# Altium PCB ESC_BOARD.PcbDoc (part 2 of 3)
Units mm, origin at the board's own origin, x right, y up, seen from the top; angles counter-clockwise.
Board outline 80 x 50 mm, 2 copper layers (Top Layer, Bottom Layer); 102 components, 86 nets, 400 pads, 339 vias.
Unrouted connection lines stored in the file: 55.
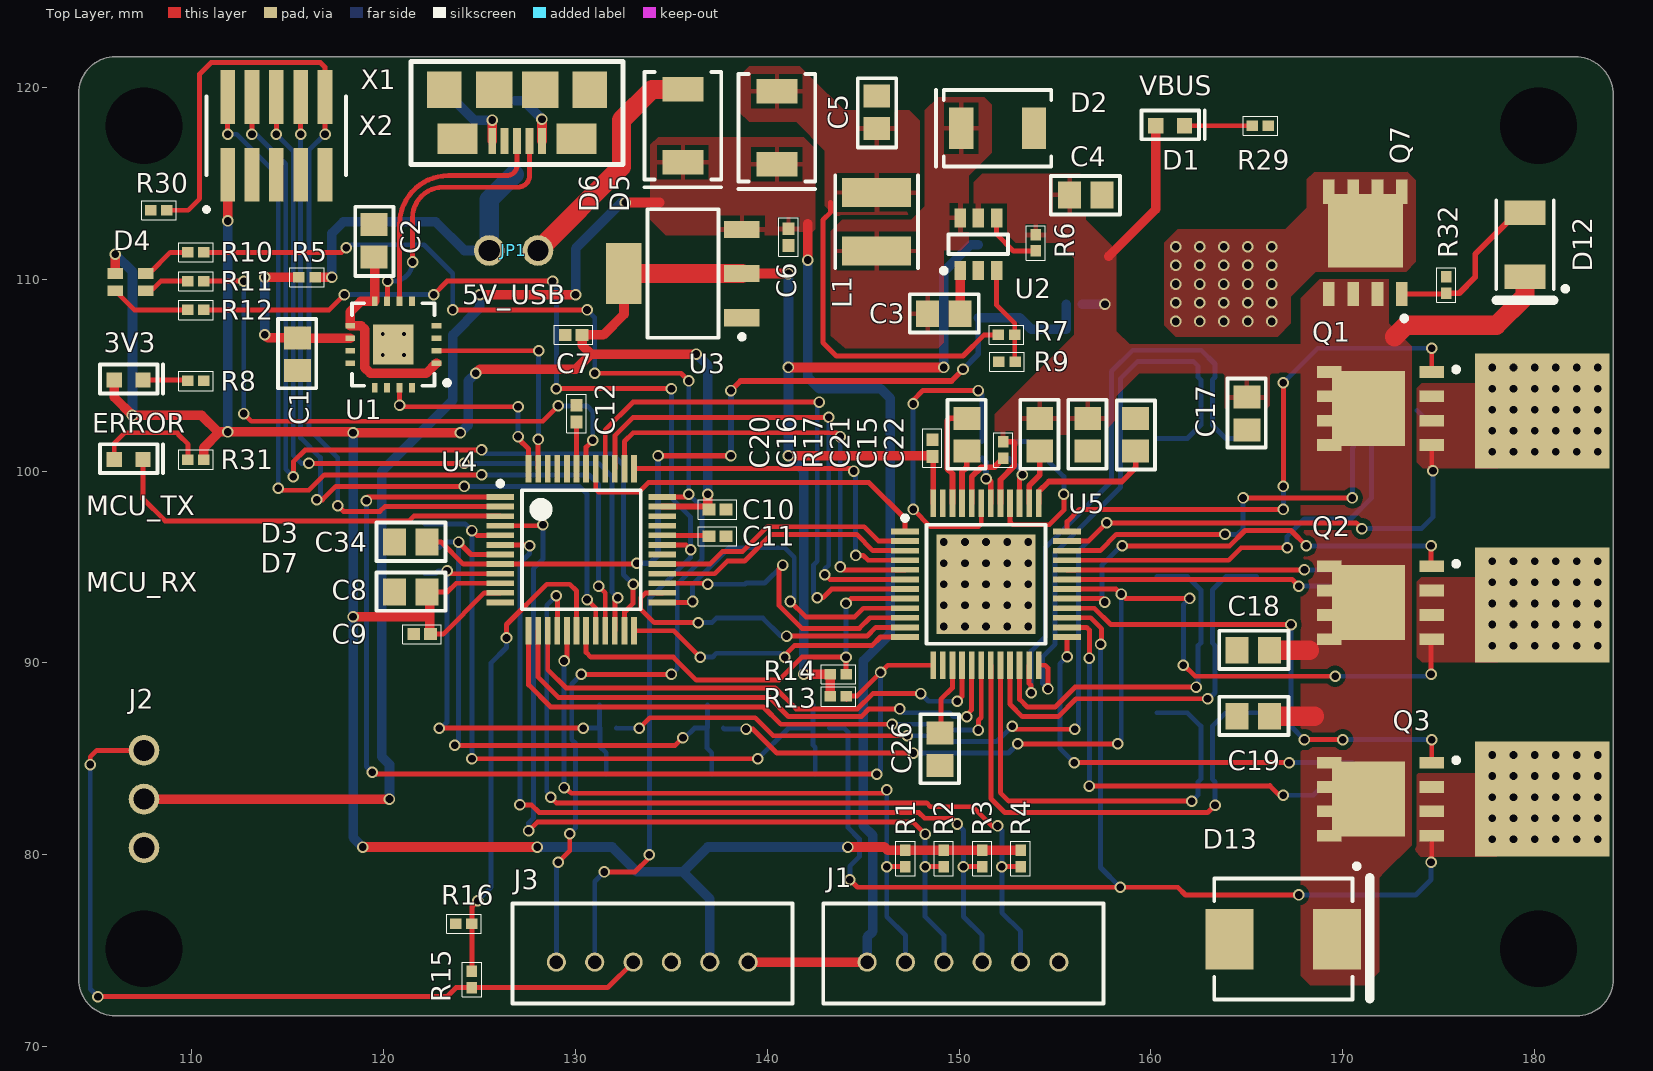
[diagram p0: Top Layer view]

## Part data (continued)
U3: "IC LDO 3V3 1A Voltage Regulators LDO BJT HiCurr", Case/Package=TO-261-4, Dropout Voltage=1.1V, Manufacturer=Diodes, Max Input Voltage=13V, Max Operating Temperature=125°C, Max Output Current=1A, Min Operating Temperature=-40°C, Operating Supply Current=3.5mA, Output Voltage=3.3V, Package Quantity=4000, Power Supply Rejection Ratio (PSRR)=70dB, Reference Voltage=1.262V, Supplier Part Number 1=AZ1117EH-3.3TRG1DICT-ND, Accuracy=1%, Contact Plating=Tin, Lead Free="Lead Free", Manufacturer Part Number=AZ1117EH-3.3TRG1, Mount="Surface Mount", Number of Outputs=1, Number of Pins=3, Number of Regulators=1, Output Current=1A, Packaging="Tape and Reel", Polarity=Positive, Pricing 1="1=0.43, 10=0.321, 100=0.1815, 500=0.1202, 1000=0.0922 (USD)", Quiescent Current=3.5mA, Stock 1=105343, Supplier 1=Digi-Key, Weight=0.000282oz
U4: "IC MCU 32-bit Piccolo F2802x C28x RISC 32KB Flash 3.3V 48-Pin LQFP T/R", Case/Package=LQFP, Frequency=60MHz, Manufacturer="Texas Instruments", Max Frequency=50MHz, Max Operating Temperature=105°C, Max Supply Voltage=3.63V, Min Operating Temperature=-40°C, Min Supply Voltage=2.97V, Operating Supply Voltage=3.3V, Package Quantity=250, Supplier Part Number 1=296-36529-ND, ComponentLink1Description=https://datasheet.ciiva.com/6656/tms320f28020-6656816.pdf, ComponentLink1URL=https://datasheet.ciiva.com/6656/tms320f28020-6656816.pdf, ComponentLink2Description=https://datasheet.ciiva.com/23944/tms320f28026-23944835.pdf, ComponentLink2URL=https://datasheet.ciiva.com/23944/tms320f28026-23944835.pdf, ComponentLink3Description=https://datasheet.ciiva.com/28626/1827035-28626823.pdf, ComponentLink3URL=https://datasheet.ciiva.com/28626/1827035-28626823.pdf, ComponentLink4Description=https://datasheet.ciiva.com/29722/tms320f28026f-29722007.pdf, ComponentLink4URL=https://datasheet.ciiva.com/29722/tms320f28026f-29722007.pdf, ComponentLink5Description=https://datasheet.ciiva.com/29986/tms320f28026-29986743.pdf, ComponentLink5URL=https://datasheet.ciiva.com/29986/tms320f28026-29986743.pdf, ComponentLink6Description=https://datasheet.ciiva.com/29722/tms320f28026f-29722008.pdf, ComponentLink6URL=https://datasheet.ciiva.com/29722/tms320f28026f-29722008.pdf, ComponentLink7Description=https://datasheet.ciiva.com/29986/tms320f28026-29986744.pdf, ComponentLink7URL=https://datasheet.ciiva.com/29986/tms320f28026-29986744.pdf, ComponentLink8Description=https://datasheet.ciiva.com/16383/sprs523j-317502-16383180.pdf, ComponentLink8URL=https://datasheet.ciiva.com/16383/sprs523j-317502-16383180.pdf, Data Bus Width=32b, Interface=I2C,SPI,UART,USART,SCI, Lead Free="Lead Free", Manufacturer Part Number=TMS320F28026FPTT, Memory Size=32KB, Memory Type=FLASH, Mount="Surface Mount", Number of ADC Channels=8, Number of I/Os=22, Number of Pins=48, Number of Programmable I/O=22, Number of Timers/Counters=3, Number of UART Channels=1, Oscillator Type=Internal, Packaging="Tape and Reel", Peripherals="Brown-out Detect/Reset,POR,PWM,WDT", Pricing 1="1=7.19, 10=6.499, 100=5.3809 (USD)", Radiation Hardening=No, RAM Size=12KB, REACH SVHC="No SVHC", Stock 1=202, Supplier 1=Digi-Key
U5: "IC 3-Phase Gate Driver IC 4.4V to 45V 48-Pin HTQFP T/R", Manufacturer="Texas Instruments", Max Operating Temperature=125°C, Max Output Current=1A, Max Supply Voltage=45V, Min Operating Temperature=-40°C, Min Supply Voltage=4.4V, Output Current=80mA, Supplier Part Number 1=296-42657-1-ND, Channel Type=3-Phase, ComponentLink1Description=http://www.ti.com/general/docs/lit/getliterature.tsp?genericPartNumber=DRV8305&&fileType=pdf, ComponentLink1URL=http://www.ti.com/general/docs/lit/getliterature.tsp?genericPartNumber=DRV8305&&fileType=pdf, ComponentLink2Description=http://www.ti.com/lit/pdf/slyb165, ComponentLink2URL=http://www.ti.com/lit/pdf/slyb165, ComponentLink3Description=http://www.farnell.com/datasheets/2075775.pdf, ComponentLink3URL=http://www.farnell.com/datasheets/2075775.pdf, Lead Free="Lead Free", Manufacturer Part Number=DRV83053PHPR, Mount="Surface Mount", Number of Drivers=6, Number of Outputs=1, Number of Pins=48, Packaging="Cut Tape", Pricing 1="1=5.04, 10=4.53, 100=3.7117, 500=3.1597 (USD)", REACH SVHC="No SVHC", Stock 1=2033, Supplier 1=Digi-Key, Type="Integrated Circuit (IC)"
X1: "CONN_USB - micro B USB 2.0 Receptacle Connector 5 Position Surface Mount, Right Angle, Horizontal", Colour=Black, Current Rating=1.8A, Flammability Rating="UL94 V-0", Insulation Resistance=1GR, Manufacturer="Amphenol FCI", Max Operating Temperature=85°C, Max Voltage Rating (AC)=100V, Min Operating Temperature=-55°C, Package Quantity=1400, Supplier Part Number 1=609-4613-1-ND, ComponentLink1Description=https://datasheet.ciiva.com/26853/getdatasheetpartid-418041-26853891.pdf, ComponentLink1URL=https://datasheet.ciiva.com/26853/getdatasheetpartid-418041-26853891.pdf, ComponentLink2Description=https://datasheet.ciiva.com/851/10118192-851112.pdf, ComponentLink2URL=https://datasheet.ciiva.com/851/10118192-851112.pdf, ComponentLink3Description=https://datasheet.ciiva.com/4598/10118192ac-197249-4598796.pdf, ComponentLink3URL=https://datasheet.ciiva.com/4598/10118192ac-197249-4598796.pdf, Connector Type=USB,Receptacle, Contact Material="Copper Alloy", Contact Plating=Nickel,Gold, Depth=5.57mm, Gender=Receptacle, Housing Material=Polymer, Lead Free="Lead Free", Length=7.86mm, Manufacturer Part Number=10118192-0001LF, Mount="Surface Mount,Horizontal", Number of Contacts=5, Number of Ports=1, Number of Terminals=5, Orientation="Right Angle", Packaging="Tape and Reel", Pitch=0.65mm, Pricing 1="1=0.46, 10=0.437, 25=0.3744, 50=0.318, 100=0.3056, 250=0.2744, 500=0.262 (USD)", Radiation Hardening=No, REACH SVHC="No SVHC", Stock 1=197826, Supplier 1=Digi-Key, Termination=Solder, USB Standard="USB 2.0", Voltage Rating=100V
X2: "CONN_JTAG_10pin .050 Connector Dual Header 10 Position Surface Mount", Colour=Black, Manufacturer=Samtec, Max Current Rating=1.75A, Max Operating Temperature=125°C, Min Operating Temperature=-55°C, Package Quantity=1, Supplier Part Number 1=SAM8796-ND, ComponentLink1Description=https://datasheet.ciiva.com/19461/2046846-19461026.pdf, ComponentLink1URL=https://datasheet.ciiva.com/19461/2046846-19461026.pdf, ComponentLink2Description=https://datasheet.ciiva.com/738/ftsh-1xx-xx-xxx-dv-xxx-mkt-738998.pdf, ComponentLink2URL=https://datasheet.ciiva.com/738/ftsh-1xx-xx-xxx-dv-xxx-mkt-738998.pdf, ComponentLink3Description=https://datasheet.ciiva.com/10245/ftsh-mt-10245273.pdf, ComponentLink3URL=https://datasheet.ciiva.com/10245/ftsh-mt-10245273.pdf, ComponentLink4Description=https://datasheet.ciiva.com/16657/ftsh-mt-16657371.pdf, ComponentLink4URL=https://datasheet.ciiva.com/16657/ftsh-mt-16657371.pdf, ComponentLink5Description=https://datasheet.ciiva.com/15195/getdatasheetpartid-133463-15195260.pdf, ComponentLink5URL=https://datasheet.ciiva.com/15195/getdatasheetpartid-133463-15195260.pdf, Connector Type="Male Pin", Contact Material=Bronze,Copper, Contact Mating Length=0.12inch, Contact Plating=Nickel,Gold, Depth=3.43mm, Height=3.3mm, Housing Colour=Black, Housing Material=Polymer, Lead Free="Lead Free", Length=15.2mm, Manufacturer Part Number=FTSH-105-01-F-DV-K, Mount="Surface Mount", Number of Contacts=10, Number of Positions=10, Number of Rows=2, Orientation=Straight, Packaging=Rail/Tube, Pitch=1.27mm, Pricing 1="1=2.9, 10=2.784, 100=2.32, 500=1.972, 1000=1.682, 5000=1.508 (USD)", Radiation Hardening=No, Row Spacing=0.05inch, Stock 1=18199, Supplier 1=Digi-Key, Termination=Solder

## Free pads (board coordinates)
  round 0 hole 4 unplated: 1(107.5,118) 2(107.5,75.1) 4(180.2,75.1) 5(180.2,118)
  rect 7x6 smd far side: 1(163.2,78.8) 1(163.8,109.75)
  rect 7x6 smd: 1(180.4,103.138) 2(180.4,93.008) 3(180.4,82.9)

## Via types
v1: diameter 0.6, hole 0.4, Top Layer to Bottom Layer, 310 vias
v2: diameter 0.7, hole 0.4, Top Layer to Bottom Layer, 25 vias
v3: diameter 0.5, hole 0.2, Top Layer to Bottom Layer, 4 vias

## Nets (pads, with @x,y where several pads share a name; then routed paths per layer and width w, separated by ;. In a path a pad name is that pad's centre, name@x,y a point inside that pad or via, vN(x,y) a via of type N, cw(c..) or ccw(c..) an arc to the next point about the centre after c; other vN are vias at no path point)
5V_SW: C3.1 D2.2 L1.1 U2.6
+3V3: C7.2 C8.2 C9.2 C10.2 C20.2 D3.1 D4.4 D8.2 D9.2 D10.2 D11.2 J3.5 R1.2 R2.2 R3.2 R4.2 R13.2 R14.2 R31.2 U3.2 U4.10 U4.11 U4.35 U5.48 X2.1 | length 211.8
  Top Layer w0.254: C8.2@122.25,93.7 123.322,93.7 123.772,94.15 U4.10@126.075,94.15 ; C9.2@122.44,91.5 123.1,91.5 125.25,93.65 U4.11@126.075,93.65
  Top Layer w0.3: U4.35@134.525,98.15 C10.2@136.9,98.15 ; U5.48@148.65,98.325 C20.2@148.65,100.71
  Top Layer w0.5: D3.1@105.95,104.75 105.95,103.85 v1(106.9,102.9) 110.5,102.9 111.4,102 ; D4.4@106,110.3 v1(106,111.3) ; R31.2@110.625,100.6 110.625,101.225 111.4,102 ; v1(111.86,113.04) X2.1@111.86,115.44 ; v1(118.4,92.4) 122.4,92.4 ; v1(118.9,80.4) v1(128,80.4) ; C8.2@122.25,93.7 122.4,93.55 122.4,92.4 ; C9.2@122.44,91.5 122.4,91.54 122.4,92.4 ; v1(124,102) v1(118.4,102) 118.36,102.04 v1(111.86,102.04) 111.44,102.04 111.4,102 ; v1(124.8,105.1) 125,105.3 130,105.3 130.8,106.1 ; U3.2@132.525,110.3 132.525,108.175 131.45,107.1 C7.2@130.34,107.1 130.34,106.56 130.8,106.1 ; v1(136.3,106.1) 130.8,106.1 ; C10.2@136.9,98.04 136.9,98.15 v1(136.9,98.8) ; U3.2@138.675,110.3 v1(141.1,110.3) ; v1(141.1,100.8) 148.56,100.8 C20.2@148.6,100.76 C20.2@148.65,100.71 ; v1(141.1,105.4) v1(149.2,105.4) ; v1(141.9,89.4) R14.2@143.275,89.4 R13.2@143.275,88.25 ; v1(144.2,80.4) 146.1,80.4 146.275,80.225 R1.2@147.2,80.225 R2.2@149.2,80.225 R3.2@151.2,80.225 R4.2@153.2,80.225
  Top Layer w1: U3.2@132.525,110.3 U3.2@138.675,110.3
  Bottom Layer w0.5: v1(106,111.3) 106.9,110.4 v1(106.9,102.9) ; v1(111.86,102.04) v1(111.86,113.04) ; v1(118.4,102) v1(118.4,92.4) 118.4,80.9 v1(118.9,80.4) ; v1(124,102) 124.4,102.4 124.4,104.7 v1(124.8,105.1) ; v1(128,80.4) D8.2@131.6,80.4 131.905,80.4 133.205,79.1 135.595,79.1 ; v1(136.3,106.1) 136.9,105.5 v1(136.9,98.8) ; J3.5@137,74.4 137,77.695 135.595,79.1 ; v1(141.1,110.3) v1(141.1,105.4) v1(141.1,100.8) 141.9,100 v1(141.9,89.4) ; v1(144.2,80.4) D10.2@142.5,80.4 D9.2@137.1,80.4 136.895,80.4 135.595,79.1 ; v1(149.2,105.4) 149.2,110.4 150.6,111.8 D11.2@151,111.8
+5V: C6.2 D5.2 D6.2 J1.1 J2.2 J3.6 U3.3 | length 103.5
  Top Layer w0.5: J2.2@107.5,82.9 v1(120.3,82.9) ; v1(125,109.2) v1(130,109.2) ; v1(132.6,114) 134.4,114 ; U3.3@138.675,112.6 U3.3@138.715,112.64 ; J3.6@139,74.4 J1.1@145.2,74.4 ; v1(142.1,111) 142.1,112.9
  Bottom Layer w0.5: v1(120.3,82.9) 120.3,84.7 119.9,85.1 119.9,100 123.6,103.7 123.6,107.1 125,108.5 v1(125,109.2) ; v1(130,109.2) 130,111.6 132.4,114 v1(132.6,114) ; v1(142.1,111) 142.1,104.9 142.7,104.3 145.9,104.3 146.4,103.8 146.4,91.5 145,90.1 145,81.5 145.5,81 145.5,76 145.2,75.7 J1.1@145.2,74.4
+5V_BUCK: C5.2 D5.1 L1.2 R7.2 | length 17.4
  Top Layer w0.254: 143.3,114 143.3,113.499 142.9,113.099 142.9,106.7 143.6,106 150.2,106 151.3,107.1 R7.2@152.05,107.1
+5V_USB: FB1.2 JP1.1 R5.1 | length 16.5
  Top Layer w0.5: R5.1@116.625,110.1 v1(117.3,110.1)
  Bottom Layer w0.5: v1(117.3,110.1) 117.3,112.4 117.9,113 122.7,113 124.2,111.5 JP1.1@125.5,111.5
  Bottom Layer w1: JP1.1@125.5,111.5 125.5,114.16 FB1.2@126.8,115.46
+VBUS: C4.2 C15.2 C17.2 C18.2 C19.2 C21.2 D1.1 D12.1 D13.1 Q1.2 Q2.2 Q3.2 Q7.3 R6.2 R17.2 R27.2 U2.5 U5.41 | length 26.1
  Top Layer w0.3: U5.41@152.15,98.325 152.15,99.55 152.875,100.275 152.875,101.475 152.825,101.525 R17.2@152.3,101.525
  Top Layer w0.5: 157.8,111.2 160.25,113.65 D1.1@160.25,118
  Top Layer w1: C19.2@166.19,87.22 168.52,87.22 ; C18.2@166.19,90.66 168.26,90.66 ; 172.7,107 173.3,107.6 178,107.6 179.5,109.1 D12.1@179.5,110.135
  Bottom Layer w0.5: R27.2@156.425,108.7 v1(157.6,108.7)
+VIN: C32.2 C33.2 pad.1@163.8,109.75 Q7.2
  other v1: 161.3,107.8 162.55,107.8 163.8,107.8 165.05,107.8 166.3,107.8 161.3,108.775 162.55,108.775 163.8,108.775 165.05,108.775 166.3,108.775 161.3,109.75 162.55,109.75 163.8,109.75 165.05,109.75 166.3,109.75 161.3,110.725 162.55,110.725 163.8,110.725 165.05,110.725 166.3,110.725 161.3,111.7 162.55,111.7 163.8,111.7 165.05,111.7 166.3,111.7
A_HS: U4.29 U5.2 | length 13.8
  Top Layer w0.254: U4.29@134.525,95.15 137,95.15 137.65,95.8 138.7,95.8 140,97.1 145.05,97.1 145.8,96.35 U5.2@147.175,96.35